# EAGLE board Super-Regenerative-VHF-2Transistor-RickAndersen-October2006 (EAGLE 7.6.0)
A Superregen Receiver for FM broadcast or Aircraft band AM reception http://www.ke3ij.com/superrgn.htm
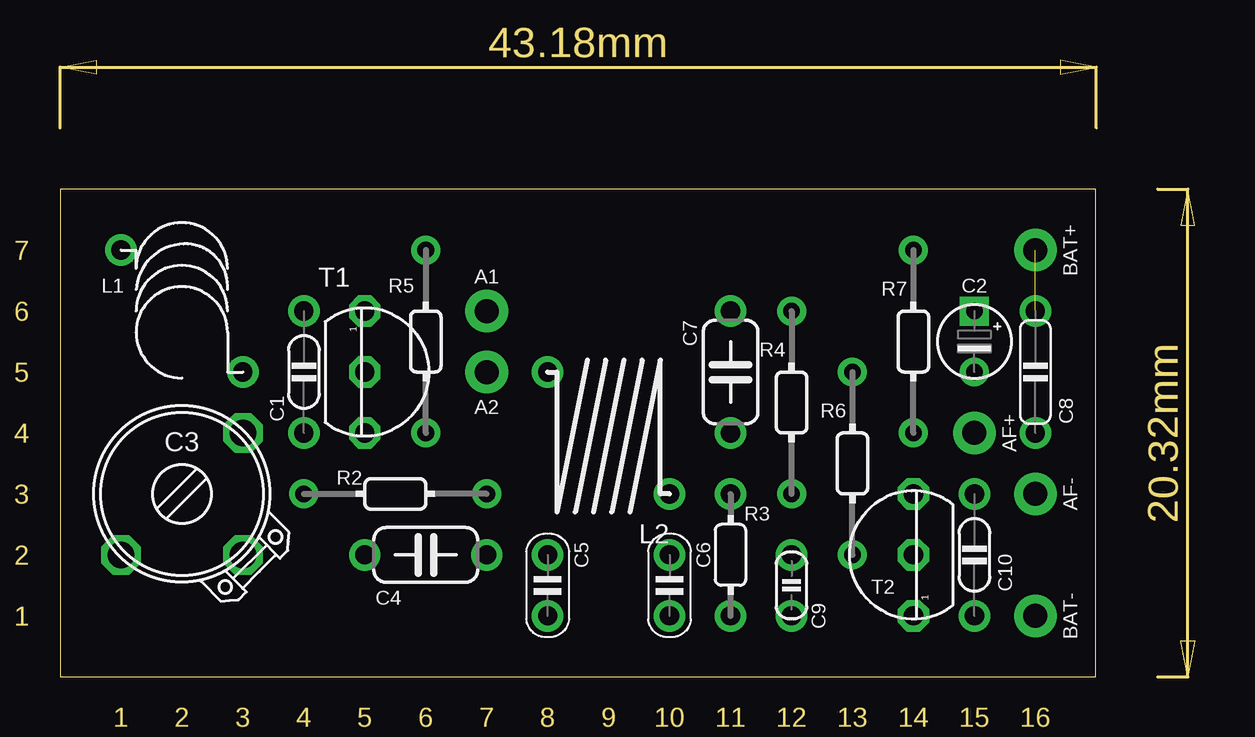
[diagram p0: board, top side]
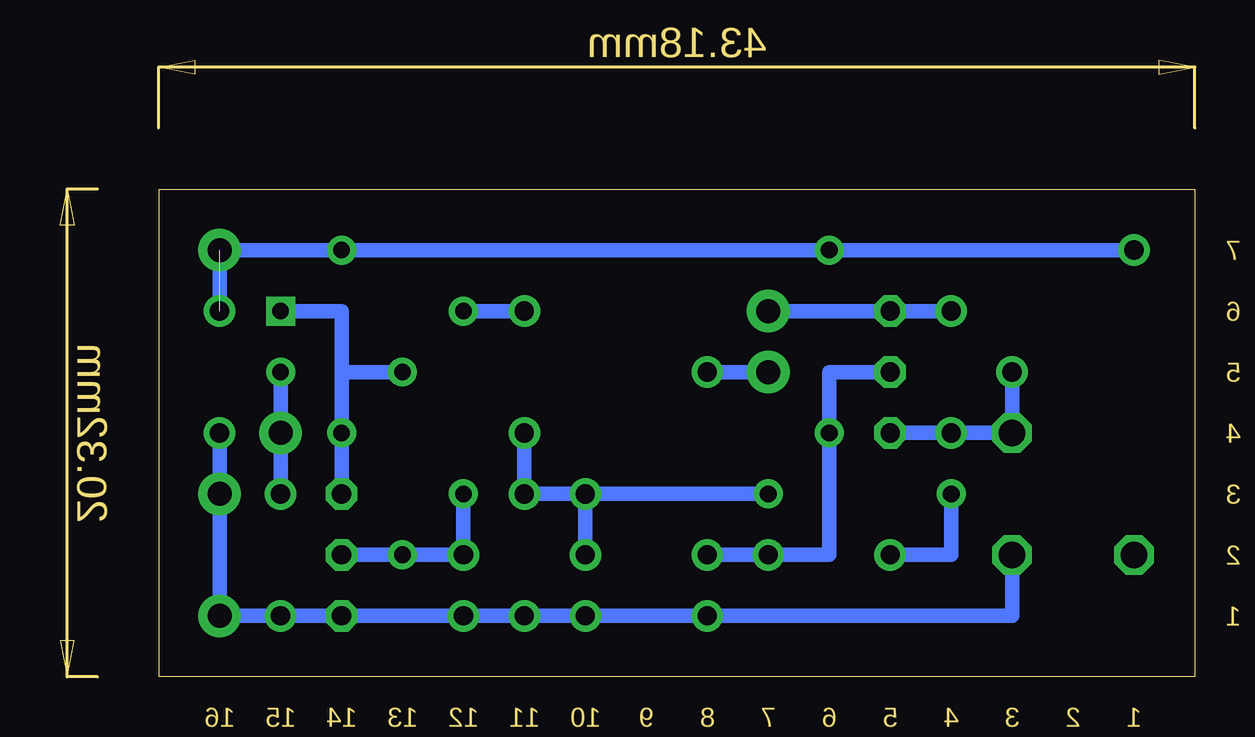
[diagram p1: board, bottom side, seen from below]

Size 43.16 x 20.32 mm. Coordinates in mm from the lower left corner, seen from the top.
Outline: 0,0 43.16,0 43.16,20.32 0,20.32 0,0
Copper layers (1*16): Top 0.035mm / dielectric 1.5mm / Bottom 0.035mm
Design rules "default": minimum track width 10mil, minimum drill 24mil, track to track 8mil, track to pad 8mil, pad to pad 8mil, via to via 8mil, smd to smd 8mil, copper to edge 40mil, drill to drill 8mil, minimum pad ring 10mil, minimum via ring 8mil, stop-mask expansion 4mil, vias tented up to drill 0mil, thermal gap 10mil
Net classes: 0 default: width 0.61 mm

## Footprints (pad centres in the part's own frame; a part is rotated, then mirrored left to right if it is on the bottom)
SPAD = drill 1 pad 1.778: 1 0,0
C050-020X036 = drill 0.8: 1 -2.54,0; 2 2.54,0
E2,5-3 = drill 0.7 square: + 0,1.27 | drill 0.7: - 0,-1.27
TRIM-2222-808 = drill 1.1 octagon: 1 -2.54,2.54; 2 -2.54,-2.54; 3 2.54,-2.54
C050-024X044/V = drill 0.8: 1 0,2.54; 2 0,-2.54
C025-020X036 = drill 0.8: 1 0,0; 2 2.54,0
C050-020X044 = drill 0.8: 1 -2.54,0; 2 2.54,0
C025-015X024 = drill 0.8: 1 0,1.27; 2 0,-1.27
C050-020X036/V = drill 0.8: 1 0,-2.54; 2 0,2.54
L-04-5/5V = drill 0.8: 1 -2.54,2.54; 2 2.54,-2.54
L-08-5/5H = drill 0.8: 1 -2.54,2.54; 2 2.54,-2.54
0202/7 = drill 0.7: 1 0,3.81; 2 0,-3.81
0202/5-V = drill 0.8: 1 0,2.54; 2 0,-2.54
0202/7-V = drill 0.7: 1 0,3.81; 2 0,-3.81
TO92 = drill 0.8 octagon: 1 -2.54,0; 2 0,0; 3 2.54,0

## Placement (x,y rotation side)
A1  SPAD  [SPAD]  17.78,15.24 270 top
A2  SPAD  [SPAD]  17.78,12.7 90 top
AF+  SPAD  [SPAD]  38.1,10.16 180 top
AF-  SPAD  [SPAD]  40.64,7.62 180 top
BAT+  SPAD  [SPAD]  40.64,17.78 180 top
BAT-  SPAD  [SPAD]  40.64,2.54 180 top
C1  7pF  [C050-020X036]  10.16,12.7 270 top
C2  2.2uF  [E2,5-3]  38.1,13.97 0 top
C3  15pF  [TRIM-2222-808]  5.08,7.62 90 top
C4  470nF  [C050-024X044/V]  15.24,5.08 90 top
C5  1nF  [C025-020X036]  20.32,5.08 270 top
C6  1nF  [C025-020X036]  25.4,5.08 270 top
C7  470nF  [C050-024X044/V]  27.94,12.7 0 top
C8  100nF  [C050-020X044]  40.64,12.7 270 top
C9  10nF  [C025-015X024]  30.48,3.81 0 top
C10  47nF  [C050-020X036/V]  38.1,5.08 180 top
L1  0.22uH  [L-04-5/5V]  5.08,15.24 0 top
L2  0.33uH  [L-08-5/5H]  22.86,10.16 180 top
R2  12k  [0202/7]  13.97,7.62 90 top
R3  10k  [0202/5-V]  27.94,5.08 180 top
R4  22k  [0202/7-V]  30.48,11.43 0 top
R5  330k  [0202/7]  15.24,13.97 0 top
R6  220k  [0202/7-V]  33.02,8.89 180 top
R7  4.7k  [0202/7-V]  35.56,13.97 0 top
T1  2N3904  [TO92]  12.7,12.7 270 top
T2  2N3904  [TO92]  35.56,5.08 90 top

## Library data of the parts
A1 A2 AF+ AF- BAT+ BAT- = pad
C1 C2 C4-C10 = c
C3 = cap-trim
L1 L2 = l
R2-R7 = r
T1 T2 = t

## Nets
GND: AF-.1 BAT-.1 C3.2 C5.2 C6.2 C8.2 C9.2 C10.2 R3.1 T2.1
N$1: C1.2 C3.3 L1.2 T1.3
N$2: A1.1 C1.1 T1.1
N$3: C7.1 R4.1
N$4: C4.2 C5.1 R5.2 T1.2
N$5: C2.+ R6.2 R7.2 T2.3
N$6: C6.1 C7.2 L2.1 R2.2 R3.2
N$7: C4.1 R2.1
N$8: A2.1 L2.2
N$10: C9.1 R4.2 R6.1 T2.2
N$11: AF+.1 C2.- C10.1
VCC: BAT+.1 C8.1 L1.1 R5.1 R7.1

## Tracks (layer width: path | path; a pad name or v marks a point on that pad's centre or on a via)
GND
  Bottom 0.61: C3.2 7.62,2.54 C5.2 C6.2 R3.1 C9.2 T2.1 C10.2 BAT-.1 AF-.1 C8.2
N$1
  Bottom 0.61: L1.2 C3.3 T1.3 C1.2
N$2
  Bottom 0.61: C1.1 T1.1 A1.1
N$3
  Bottom 0.61: C7.1 R4.1
N$4
  Bottom 0.61: T1.2 15.24,12.7 R5.2 15.24,5.08 C4.2 C5.1
N$5
  Bottom 0.61: 35.56,12.7 R7.2 T2.3 | 35.56,12.7 35.56,15.24 C2.+ | R6.2 35.56,12.7
N$6
  Bottom 0.61: C7.2 R3.2 L2.1 | C6.1 L2.1 | L2.1 R2.2
N$7
  Bottom 0.61: R2.1 10.16,5.08 C4.1
N$8
  Bottom 0.61: A2.1 L2.2
N$10
  Bottom 0.61: T2.2 R6.1 C9.1 R4.2
N$11
  Bottom 0.61: C2.- AF+.1 C10.1
VCC  (1 unrouted)
  Bottom 0.61: L1.1 R5.1 R7.1 BAT+.1 C8.1

## Text on the board
Dimension: 7 | 6 | 5 | 4 | 3 | 2 | 1 | 1 | 2 | 3 | 4 | 5 | 6 | 7 | 8 | 9 | 10 | 11 | 12 | 13 | 14 | 15 | 16